# EAGLE board 226_arrayrelay (EAGLE 9.6.0)
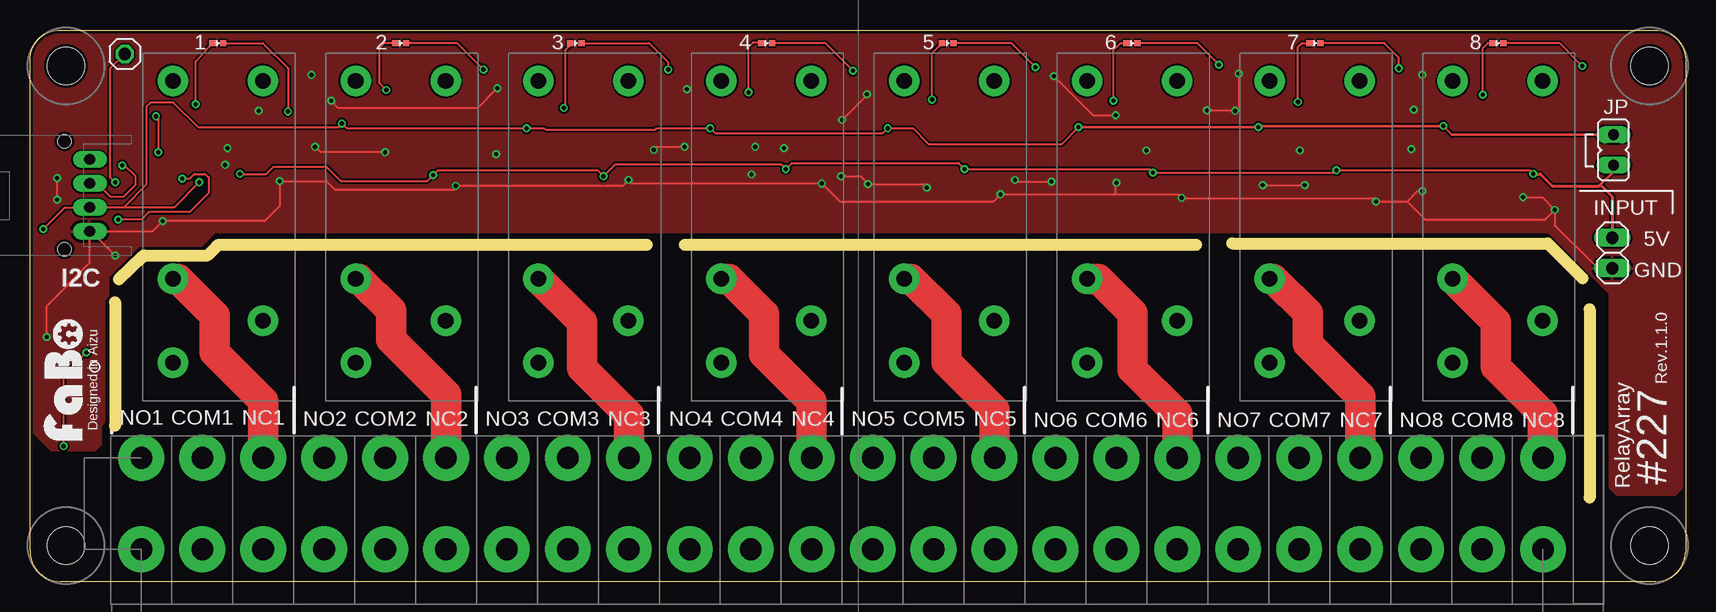
[diagram p0: board, top side]
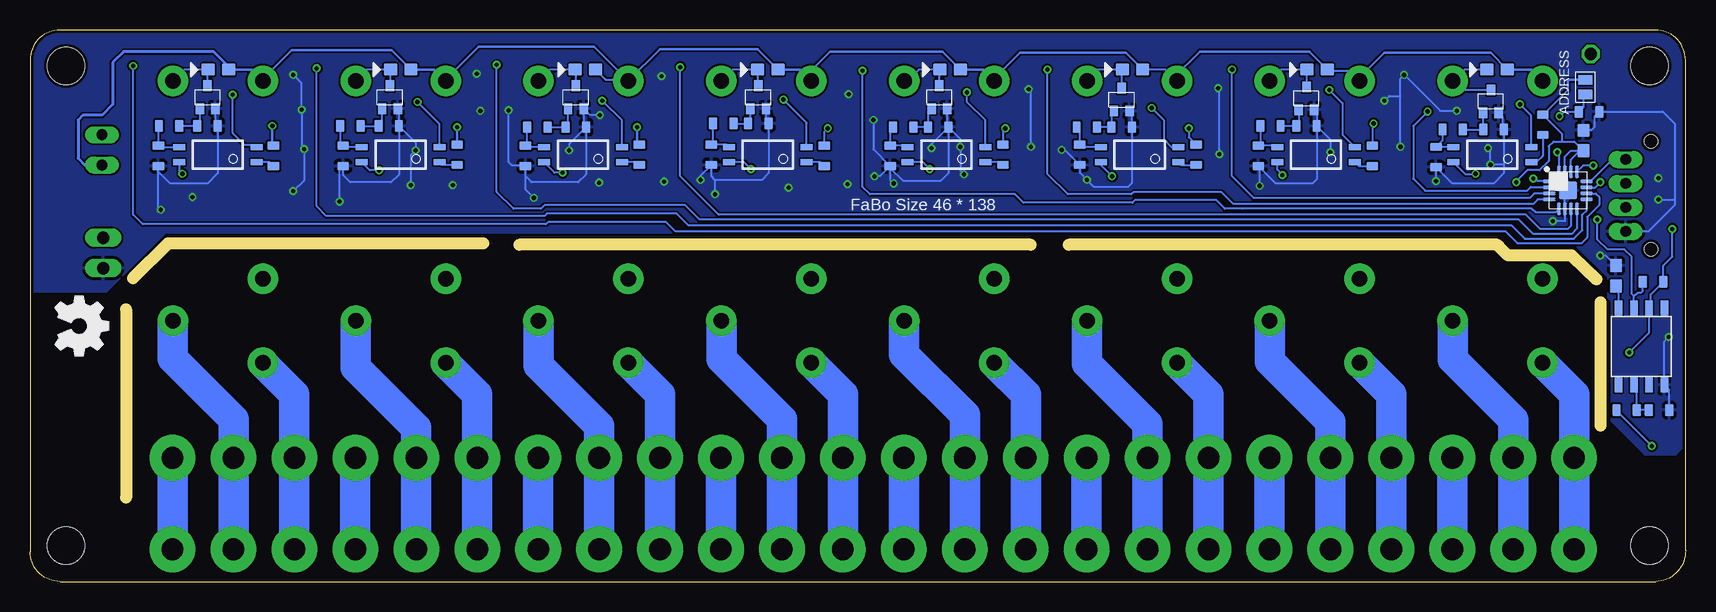
[diagram p1: board, bottom side, seen from below]

Size 138 x 46 mm. Coordinates in mm from the lower left corner, seen from the top.
Outline: 0,2.6 0,43.5 arc-90 2.5,46 135.5,46 arc-90 138,43.5 138,2.5 arc-90 135.5,0 2.5,0 arc-90 0,2.6
Copper layers (1*16): Top 0.035mm / dielectric 1.5mm / Bottom 0.035mm
Design rules "SeeedStudio_2layer_DRU_no_angle_20140221": minimum track width 6mil, minimum drill 12mil, track to track 6mil, track to pad 6mil, pad to pad 6mil, via to via 6mil, smd to smd 0mil, copper to edge 10mil, drill to drill 10mil, minimum pad ring 10mil, minimum via ring 6mil, stop-mask expansion 2mil, vias tented up to drill 100mil, thermal gap 10mil
Holes 3.1 mm at 3,3 3,43 135,43 135,3
Milling: 9 lines

## Footprints (pad centres in the part's own frame; a part is rotated, then mirrored left to right if it is on the bottom)
0603 = smd 1.1 x 1: 1 -0.85,0; 2 0.85,0
TBL004-508 = drill 1.8 pad 3.81: P$1 0,3.81; P$2 0,-3.81
0603' = smd 1.1 x 1: ANODE -0.85,0; CATHODE 0.85,0
NXP-PCAL6408A = smd 1 x 0.3: 1 -1.55,0.75; 2 -1.55,0.25; 3 -1.55,-0.25; 4 -1.55,-0.75; 9 1.55,-0.75; 10 1.55,-0.25; 11 1.55,0.25; 12 1.55,0.75 | smd 0.3 x 1: 5 -0.75,-1.55; 6 -0.25,-1.55; 7 0.25,-1.55; 8 0.75,-1.55; 13 0.75,1.55; 14 0.25,1.55; 15 -0.25,1.55; 16 -0.75,1.55 | smd 1.5 x 1.5: 17 0,0
FABO_BRICK_I2C_S04B-PASK-2_LONG = drill 0.9 pad 1.422 long: GND -3,0; SCL 3,0; SDA 1,0; VCC -1,0 | hole 1.1: 4.5,2.1; -4.5,2.1
1X01 = drill 1.016 octagon: 1 0,0
JP1 = drill 0.914 long: 1 0,-1.27; 2 0,1.27
1X02 = drill 1.016 long: 1 -1.27,0; 2 1.27,0
0402-NO_SILK = smd 0.5 x 0.5: ANODE -0.46,0; CATHODE 0.46,0
0603-NARROW = smd 0.71 x 1: 1 -0.85,0; 2 0.85,0
G2RL-1 = drill 1.3 pad 2.54: 1 -11.75,-3.75; 2 4.75,-3.75; 3 11.75,-3.75; 4 8.25,3.75; 5 -11.75,3.75
SMD-JUMPER-2-OPEN = smd 0.8 x 1.2: 1 -0.6,0; 2 0.6,0
SOT-323 = smd 0.7 x 0.9: 1 -0.65,-0.95; 2 0.65,-0.95; 3 0,0.95
11-3C1 = smd 1 x 0.5: 1 -3.24,0.635; 2 -3.24,-0.635; 3 3.24,-0.635; 4 3.24,0.635
SO8 = smd 1.27 x 0.635: 1 -3.21,1.87; 2 -3.21,0.6; 3 -3.21,-0.67; 4 -3.21,-1.94; 5 3.19,1.87; 6 3.19,0.6; 7 3.19,-0.67; 8 3.19,-1.94

## Placement (x,y rotation side)
C1  10uF  [0603]  8.51,36.78 270 bottom
C2  0.01uF  [0603]  5.8,25.5 270 bottom
COM1  TBL004-508  [TBL004-508]  14.36,6.5 0 top
COM2  TBL004-508  [TBL004-508]  29.6,6.5 0 top
COM3  TBL004-508  [TBL004-508]  44.84,6.5 0 top
COM4  TBL004-508  [TBL004-508]  60.08,6.5 0 top
COM5  TBL004-508  [TBL004-508]  75.32,6.5 0 top
COM6  TBL004-508  [TBL004-508]  90.56,6.5 0 top
COM7  TBL004-508  [TBL004-508]  105.8,6.5 0 top
COM8  TBL004-508  [TBL004-508]  121.04,6.5 0 top
D1  1N4188  [0603']  15.7,42.7 0 bottom
D2  1N4188  [0603']  30.7,42.7 0 bottom
D3  1N4188  [0603']  46.1,42.7 0 bottom
D4  1N4188  [0603']  61.3,42.7 0 bottom
D5  1N4188  [0603']  76.5,42.7 0 bottom
D6  1N4188  [0603']  91.7,42.7 0 bottom
D7  1N4188  [0603']  107.1,42.7 0 bottom
D8  1N4188  [0603']  122.3,42.7 0 bottom
IC1  [NXP-PCAL6408A]  9.8,32.62 0 bottom
J1  [FABO_BRICK_I2C_S04B-PASK-2_LONG]  4.99,32.2 90 top
JP1  [1X01]  7.9,44 0 top
JP2  [JP1]  132,36 180 top
JP3  [1X02]  131.9,27.4 270 top
LED1  [0402-NO_SILK]  15.66,44.9 0 top
LED2  [0402-NO_SILK]  30.9,44.9 0 top
LED3  [0402-NO_SILK]  45.5,44.9 0 top
LED4  [0402-NO_SILK]  61.38,44.9 0 top
LED5  [0402-NO_SILK]  76.5,44.9 0 top
LED6  [0402-NO_SILK]  91.86,44.9 0 top
LED7  [0402-NO_SILK]  107.1,44.9 0 top
LED8  [0402-NO_SILK]  122.34,44.9 0 top
NC1  TBL004-508  [TBL004-508]  19.44,6.5 0 top
NC2  TBL004-508  [TBL004-508]  34.68,6.5 0 top
NC3  TBL004-508  [TBL004-508]  49.92,6.5 0 top
NC4  TBL004-508  [TBL004-508]  65.16,6.5 0 top
NC5  TBL004-508  [TBL004-508]  80.4,6.5 0 top
NC6  TBL004-508  [TBL004-508]  95.64,6.5 0 top
NC7  TBL004-508  [TBL004-508]  110.88,6.5 0 top
NC8  TBL004-508  [TBL004-508]  126.12,6.5 0 top
R1  1.8K  [0603-NARROW]  19.4,37.7 0 bottom
R2  10K  [0603-NARROW]  16,37.7 180 bottom
R3  1K  [0603-NARROW]  20.8,35.4 90 bottom
R4  1K  [0603-NARROW]  11.9,38.1 270 bottom
R5  1.8K  [0603-NARROW]  34.6,38 0 bottom
R6  10K  [0603-NARROW]  31.6,38 180 bottom
R7  1K  [0603-NARROW]  35.6,35.5 90 bottom
R8  1K  [0603-NARROW]  26.1,35.5 270 bottom
R9  10k  [0603-NARROW]  8.05,39.18 180 bottom
R10  1.8K  [0603-NARROW]  49.9,37.9 0 bottom
R11  10K  [0603-NARROW]  47,37.9 180 bottom
R12  1K  [0603-NARROW]  50.5,35.6 90 bottom
R13  1K  [0603-NARROW]  40.8,35.6 270 bottom
R14  1.8K  [0603-NARROW]  65.2,37.9 0 bottom
R15  10K  [0603-NARROW]  62.3,37.9 180 bottom
R16  1K  [0603-NARROW]  66.3,35.5 90 bottom
R17  1K  [0603-NARROW]  56.9,35.6 270 bottom
R18  1.8K  [0603-NARROW]  80.2,38.2 0 bottom
R19  10K  [0603-NARROW]  77.3,38.2 180 bottom
R20  1K  [0603-NARROW]  81.2,35.6 90 bottom
R21  1K  [0603-NARROW]  71.8,35.5 270 bottom
R22  1.8K  [0603-NARROW]  95.7,37.9 0 bottom
R23  10K  [0603-NARROW]  92.5,37.9 180 bottom
R24  1K  [0603-NARROW]  96.7,35.5 90 bottom
R25  1K  [0603-NARROW]  87.2,35.6 270 bottom
R26  1.8K  [0603-NARROW]  111.3,38 0 bottom
R27  10K  [0603-NARROW]  108.1,38 180 bottom
R28  1K  [0603-NARROW]  111.9,35.5 90 bottom
R29  1K  [0603-NARROW]  102.4,35.6 270 bottom
R30  1.8K  [0603-NARROW]  126.4,38 0 bottom
R31  10K  [0603-NARROW]  123.2,38 180 bottom
R32  1K  [0603-NARROW]  127.3,35.5 90 bottom
R33  1K  [0603-NARROW]  117.7,35.5 270 bottom
R34  10k  [0603-NARROW]  2.7,25 0 bottom
R35  12k  [0603-NARROW]  4.9,14.3 180 bottom
R36  10k  [0603-NARROW]  2.2,14.3 180 bottom
RL1  G2RL-1  [G2RL-1]  15.66,30 270 top
RL2  G2RL-1  [G2RL-1]  30.9,30 270 top
RL3  G2RL-1  [G2RL-1]  46.14,30 270 top
RL4  G2RL-1  [G2RL-1]  61.38,30 270 top
RL5  G2RL-1  [G2RL-1]  76.62,30 270 top
RL6  G2RL-1  [G2RL-1]  91.86,30 270 top
RL7  G2RL-1  [G2RL-1]  107.1,30 270 top
RL8  G2RL-1  [G2RL-1]  122.34,30 270 top
SJ1  OPEN  [SMD-JUMPER-2-OPEN]  8.36,41.23 270 bottom
T1  MOSFETSOT-323  [SOT-323]  16.23,40.05 0 bottom
T2  MOSFETSOT-323  [SOT-323]  31.6,40.3 0 bottom
T3  MOSFETSOT-323  [SOT-323]  47,40.2 0 bottom
T4  MOSFETSOT-323  [SOT-323]  62.2,40.4 0 bottom
T5  MOSFETSOT-323  [SOT-323]  77.3,40.4 0 bottom
T6  MOSFETSOT-323  [SOT-323]  92.5,40.4 0 bottom
T7  MOSFETSOT-323  [SOT-323]  108,40.4 0 bottom
T8  MOSFETSOT-323  [SOT-323]  123.2,40.4 0 bottom
U1  TLP291A  [11-3C1]  30.8,35.6 180 bottom
U2  TLP291A  [11-3C1]  45.5,35.6 180 bottom
U3  TLP291A  [11-3C1]  61.6,35.6 180 bottom
U4  TLP291A  [11-3C1]  16.1,35.6 180 bottom
U5  TLP291A  [11-3C1]  76.5,35.6 180 bottom
U6  TLP291A  [11-3C1]  91.9,35.6 180 bottom
U7  TLP291A  [11-3C1]  107.1,35.6 180 bottom
U8  TLP291A  [11-3C1]  122.34,35.6 180 bottom
U$2  [LOGO_OSHW_M]  133.9,21.3 270 bottom
U$3  M51957B  [SO8]  3.7,19.6 90 bottom
U$4  [LOGO_FABO_MS]  4.77,16.83 90 top
U$7  TBL004-508  [TBL004-508]  9.28,6.5 0 top
U$9  TBL004-508  [TBL004-508]  24.52,6.5 0 top
U$12  TBL004-508  [TBL004-508]  39.76,6.5 0 top
U$15  TBL004-508  [TBL004-508]  55,6.5 0 top
U$18  TBL004-508  [TBL004-508]  70.24,6.5 0 top
U$21  TBL004-508  [TBL004-508]  85.48,6.5 0 top
U$24  TBL004-508  [TBL004-508]  100.72,6.5 0 top
U$27  TBL004-508  [TBL004-508]  115.96,6.5 0 top

## Library data of the parts
C1 C2 = FaBo-Capacitor
COM1-COM8 NC1-NC8 U$7 U$9 U$12 U$15 U$18 U$21 U$24 U$27 = FaBo-Terminal
D1-D8 = FaBo-Diode
IC1 = FaBo-Mems
J1 = FaBo-Template
JP1 JP3 = pinhead
JP2 = jumper
LED1-LED8 = FaBo-LED
R1-R36 = FaBo-Resistors
RL1-RL8 = FaBo-Relay
SJ1 = FaBo-Supply
T1-T8 = FaBo-Transistor
U1-U8 = FaBo_Photocoupler
U$2 = FaBo-Logo
U$3 U$4 = FaBo-etc

## Nets
+5V: D1.CATHODE D2.CATHODE D3.CATHODE D4.CATHODE D5.CATHODE D6.CATHODE D7.CATHODE D8.CATHODE JP2.2 JP3.1 RL1.1 RL2.1 RL3.1 RL4.1 RL5.1 RL6.1 RL7.1 RL8.1 U1.4 U2.4 U3.4 U4.4 U5.4 U6.4 U7.4 U8.4
ADDRESS: IC1.16 R9.2 SJ1.2
GND: C1.1 C2.1 IC1.6 IC1.17 J1.GND JP3.2 R2.1 R3.1 R6.1 R7.1 R9.1 R11.1 R12.1 R15.1 R16.1 R19.1 R20.1 R23.1 R24.1 R27.1 R28.1 R31.1 R32.1 R36.1 T1.2 T2.2 T3.2 T4.2 T5.2 T6.2 T7.2 T8.2 U$3.4
GPIO0: IC1.2 LED1.CATHODE
GPIO1: IC1.3 LED2.CATHODE
GPIO2: IC1.4 LED3.CATHODE
GPIO3: IC1.5 LED4.CATHODE
GPIO4: IC1.7 LED5.CATHODE
GPIO5: IC1.8 LED6.CATHODE
GPIO6: IC1.9 LED7.CATHODE
GPIO7: IC1.10 LED8.CATHODE
INT: IC1.11 JP1.1
N$2: D1.ANODE RL1.5 T1.3
N$3: R1.1 R3.2 U4.3
N$4: R1.2 R2.2 T1.1
N$5: LED1.ANODE U4.2
N$6: D2.ANODE RL2.5 T2.3
N$7: R4.2 U4.1
N$8: NC1.P$1 NC1.P$2 RL1.2
N$9: COM1.P$1 COM1.P$2 RL1.4
N$10: RL1.3 U$7.P$1 U$7.P$2
N$11: R5.1 R7.2 U1.3
N$12: R5.2 R6.2 T2.1
N$13: NC2.P$1 NC2.P$2 RL2.2
N$14: COM2.P$1 COM2.P$2 RL2.4
N$15: RL2.3 U$9.P$1 U$9.P$2
N$16: LED2.ANODE U1.2
N$17: R8.2 U1.1
N$18: D3.ANODE RL3.5 T3.3
N$19: R10.1 R12.2 U2.3
N$20: R10.2 R11.2 T3.1
N$21: NC3.P$1 NC3.P$2 RL3.2
N$22: COM3.P$1 COM3.P$2 RL3.4
N$23: RL3.3 U$12.P$1 U$12.P$2
N$24: LED3.ANODE U2.2
N$25: R13.2 U2.1
N$26: D4.ANODE RL4.5 T4.3
N$27: R14.1 R16.2 U3.3
N$28: R14.2 R15.2 T4.1
N$29: NC4.P$1 NC4.P$2 RL4.2
N$30: COM4.P$1 COM4.P$2 RL4.4
N$31: RL4.3 U$15.P$1 U$15.P$2
N$32: LED4.ANODE U3.2
N$33: R17.2 U3.1
N$34: D5.ANODE RL5.5 T5.3
N$35: R18.1 R20.2 U5.3
N$36: R18.2 R19.2 T5.1
N$37: NC5.P$1 NC5.P$2 RL5.2
N$38: COM5.P$1 COM5.P$2 RL5.4
N$39: RL5.3 U$18.P$1 U$18.P$2
N$40: LED5.ANODE U5.2
N$41: R21.2 U5.1
N$42: D6.ANODE RL6.5 T6.3
N$43: R22.1 R24.2 U6.3
N$44: R22.2 R23.2 T6.1
N$45: NC6.P$1 NC6.P$2 RL6.2
N$46: COM6.P$1 COM6.P$2 RL6.4
N$47: RL6.3 U$21.P$1 U$21.P$2
N$48: LED6.ANODE U6.2
N$49: R25.2 U6.1
N$50: D7.ANODE RL7.5 T7.3
N$51: R26.1 R28.2 U7.3
N$52: R26.2 R27.2 T7.1
N$53: NC7.P$1 NC7.P$2 RL7.2
N$54: COM7.P$1 COM7.P$2 RL7.4
N$55: RL7.3 U$24.P$1 U$24.P$2
N$56: LED7.ANODE U7.2
N$57: R29.2 U7.1
N$58: D8.ANODE RL8.5 T8.3
N$59: R30.1 R32.2 U8.3
N$60: R30.2 R31.2 T8.1
N$61: NC8.P$1 NC8.P$2 RL8.2
N$62: COM8.P$1 COM8.P$2 RL8.4
N$63: RL8.3 U$27.P$1 U$27.P$2
N$64: LED8.ANODE U8.2
N$65: R33.2 U8.1
N$66: IC1.1 R34.1 U$3.6
N$67: R35.1 R36.2 U$3.2
N$68: C2.2 U$3.5
SCL: IC1.12 J1.SCL
SDA: IC1.13 J1.SDA
VCC: C1.2 IC1.14 IC1.15 J1.VCC JP2.1 R4.1 R8.1 R13.1 R17.1 R21.1 R25.1 R29.1 R33.1 R34.2 R35.2 SJ1.1 U$3.7

## Tracks (layer width: path | path; a pad name or v marks a point on that pad's centre or on a via)
+5V  (via drill 0.35)
  Top 0.152: v17.5,34 19.7,34 20.3,34.6 24.7,34.6 25.9,33.4 33.1,33.4 v33.6,33.9 34,34.3 47.3,34.3 v47.8,33.8 48.8,34.8 62.6,34.8 v63,34.4 63.5,34.9 77.4,34.9 v77.9,34.4 93.3,34.4 v93.6,34.1 108.7,34.1 v108.9,34.3 125,34.3 v125.3,34
  Top 0.254: v125.3,34 125.9,34 126.9,33 130.8,33 130.9,33.1 | 130.9,33.1 132,34.2 JP2.2 | 130.9,33.1 131.9,32.1 JP3.1
  Bottom 0.152: U8.4 125.58,34.28 v125.3,34 | U4.4 18.38,34 v17.5,34 | v33.6,33.9 34.04,34.34 U1.4 | v47.8,33.8 48.74,34.74 U2.4 | v63,34.4 63.56,34.97 U3.4 | v77.9,34.4 78.47,34.97 U5.4 | v93.6,34.1 94.28,34.1 U6.4 | v108.9,34.3 109.67,34.3 U7.4 | D2.CATHODE 29.75,42.6 28,42.6 27.3,41.9 RL2.1 | RL3.1 42.67,42.03 43.34,42.7 D3.CATHODE | D7.CATHODE 106.15,42.6 | 103.35,41.85 RL7.1 | D6.CATHODE 90.02,41.87 88.23,41.87
  Bottom 0.203: RL1.1 12.86,42.7 D1.CATHODE 16.25,44.1 25.1,44.1 27.3,41.9 | RL8.1 118.67,41.83 | 118.67,41.83 119.54,42.7 D8.CATHODE | RL7.1 104.3,42.7 D7.CATHODE 107.85,44.3 116.2,44.3 118.67,41.83 | 90.75,42.8 D6.CATHODE | RL4.1 57.74,41.86 | 57.74,41.86 58.58,42.7 D4.CATHODE 61.95,44.2 71.3,44.2 72.87,42.63 RL5.1 73.82,42.7 D5.CATHODE 77.35,44.4 85.5,44.4 88.13,41.77 | D2.CATHODE 31.35,44.2 40.5,44.2 42.67,42.03 | D3.CATHODE 46.65,44.1 55.5,44.1 57.74,41.86 | RL6.1 88.13,41.77 | 88.13,41.77 88.23,41.87 90.96,44.6 100.6,44.6 103.35,41.85
  Bottom 0.254: D8.CATHODE 121.45,42.95 122.7,44.2 130.2,44.2 131.1,43.3 131.1,39.8 132,38.9 133.6,38.9 134,38.5 134,35.3 133.43,34.73 JP2.2
ADDRESS  (via drill 0.35)
  Top 0.152: v10.7,35.8 10.7,38.6 v10.5,38.8
  Bottom 0.152: 8.6,40.6 8.5,40.7 8.5,40.5 | 8.5,40.5 SJ1.2 | v10.7,35.8 10.55,35.65 IC1.16 | 8.5,40.5 8.5,39.58 R9.2 10.12,39.18 v10.5,38.8
GND  (via drill 0.35)
  Top 0.152: v11.06,30.06 11.05,30.05 | 11.05,30.05 10.2,29.2 5.1,29.2 | 11.05,30.05 19.55,30.05 20.8,31.3 v20.8,33.4 24.7,33.4 25.4,32.7 35.4,32.7 35.7,33 | 35.7,33 49.4,33 v49.9,33.5 50.2,33.2 v66,33.2 67.5,31.7 80.3,31.7 v80.9,32.3 90.5,32.3 | 35.7,33 v35.5,33 | 90.5,32.3 95.7,32.3 v96,32 111.9,32 v112.2,31.7 114.8,31.7 | 114.8,31.7 116.3,30.2 126.3,30.2 v127.1,31 | v127.1,31 127.1,29.7 130.67,26.13 JP3.2 | v7.1,27.2 5.1,29.2 | 5.1,29.2 J1.GND 4.99,26.59 1.4,23 v1.4,20.4 | v2.26,31.86 v2.26,33.66 | v29.6,35.8 24.21,35.8 v23.76,36.26 | v38.96,41.16 37.3,39.5 25.7,39.5 v25.1,40.1 | v52,36 52.26,36.26 v54.56,36.26 | v67.6,33.8 69.21,33.8 v69.86,33.16 74.46,33.16 v74.76,32.86 | v69.76,40.66 69.76,40.56 v67.7,38.5 | v82.1,33.5 82.24,33.36 v85.16,33.36 | v85.36,42.16 88.61,38.9 v90.5,38.9 | 90.5,32.3 90.5,33.2 v90.56,33.26 | v100.76,42.36 100.76,39.56 100.5,39.3 | 100.5,39.3 v100.46,39.26 | v98.1,39.3 100.5,39.3 | v102.76,33.06 v106.26,33.06 | 114.8,31.7 115.66,32.56 v116.06,32.56 | v124.46,32.06 126.04,32.06 v127.1,31
  Bottom 0.152: R2.1 15.15,37.3 | 15.15,37.3 15.15,34.8 | 15.15,34.8 15.15,34.05 16,33.2 19.45,33.2 R3.1 v20.8,33.4 | T1.2 15.28,38.8 15.28,37.42 15.15,37.3 | C1.1 7.87,37.63 7.6,37.9 7.6,38.78 R9.1 7.18,39.2 1.9,39.2 0.9,38.2 0.9,31.8 | IC1.6 10.05,32.38 IC1.17 | IC1.6 10.14,31.07 | IC1.6 10.05,30.06 v11.06,30.06 | T2.2 30.75,39.15 R6.1 | T3.2 46.15,39.05 R11.1 46.15,33.25 46.5,32.9 49.3,32.9 v49.9,33.5 50.5,34.1 R12.1 51.75,36 v52,36 | v35.5,33 35.5,34.55 R7.1 34.15,33.2 31.1,33.2 30.75,33.55 R6.1 | T4.2 61.55,38 R15.1 | R16.1 66.3,34.5 | 66.3,34.5 66.3,33.5 v66,33.2 | T5.2 76.65,38.4 R19.1 76.45,34.05 77,33.5 80.9,33.5 | R23.1 91.85,38.1 T6.2 91.3,38.9 v90.5,38.9 | R27.1 107.25,39.35 T7.2 | T8.2 122.55,38.2 R31.1 122.35,34.05 123.2,33.2 126.3,33.2 127.3,34.2 | 127.3,34.2 R32.1 | R27.1 107.25,33.95 107.9,33.3 111.3,33.3 111.9,33.9 R28.1 112.2,34.35 v112.2,31.7 | R23.1 91.65,33.95 92.3,33.3 96.2,33.3 96.7,33.8 | 96.7,33.8 R24.1 96.75,34.7 97.8,34.7 98.1,35 v98.1,39.3 | 80.9,33.5 81.2,33.8 R20.1 82.1,33.85 v82.1,33.5 | R15.1 61.45,34.05 62.1,33.4 65.2,33.4 66.3,34.5 | v80.9,32.3 80.9,33.5 | v96,32 96.7,32.7 96.7,33.8 | v127.1,31 127.3,31.2 127.3,34.2 | 0.9,31.8 0.9,31.4 3.1,29.2 J1.GND | R36.1 1.35,15.98 U$3.4 1.76,20.04 v1.4,20.4 | C2.1 6.65,27.2 v7.1,27.2 | v2.26,31.86 0.96,31.86 0.9,31.8 | v23.76,36.26 23.76,40.5 | 23.76,40.5 23.76,41.96 v23.46,42.26 20.46,39.26 v19.06,39.26 | R6.1 29.6,36.85 v29.6,35.8 | v38.86,35.66 38.86,41.06 v38.96,41.16 | v25.1,40.1 24.7,40.5 23.76,40.5 | v54.56,36.26 54.56,40.86 v54.76,41.06 | R16.1 67.15,33.8 v67.6,33.8 | v67.7,38.5 67.7,36.05 R16.1 | R23.1 93.06,36.49 v93.06,35.96
  Bottom 0.152: v106.26,33.06 106.26,35.56 v105.86,35.96 105.86,36.61 R27.1 | v116.06,32.56 115.16,33.46 v115.16,36.06 115.36,36.26 v115.36,39.36 115.36,41.56 v116.06,42.26 | R15.1 62.86,36.49 v62.86,36.16 | R15.1 60.46,36.91 v60.46,36.26 60.46,34.26 v60.16,33.96 | v16.46,36.16 16.26,35.96 v16.26,34.76 16.21,34.8 15.15,34.8
  pour Bottom: -0.5,47.5 -0.1,47.9 138.4,47.9 140,46.3 140,26.4 137.8,24.2 131.6,24.2 126.7,29.1 15.4,29.1 14.3,28 9.1,28 6.5,25.4 6.5,23.7 6.2,23.4 6.2,13.4 3.4,10.6 0.8,10.6 -0.5,11.9
  pour Top: -0.4,48.2 -0.3,48.3 138.6,48.3 140.6,46.3 140.6,26.5 137.9,23.8 137.9,8 137.1,7.2 132.3,7.2 131.7,7.8 131.7,24 126.6,29.1 15.4,29.1 14.3,28 9.1,28 6.5,25.4 6.5,23.8 6.2,23.5 6.2,13.3 5.9,13 5.9,11.4 5.4,10.9 1.8,10.9 -0.4,13.1
GPIO0  (via drill 0.35)
  Top 0.152: LED1.CATHODE 19.4,44.9 21.5,42.8 v21.5,39.2
  Bottom 0.152: v21.5,39.2 22.7,38 22.7,33.6 21.7,32.6 13.2,32.6 12.9,32.9 11.38,32.9 IC1.2
GPIO1  (via drill 0.35)
  Top 0.152: v37.8,42.7 35.6,44.9 LED2.CATHODE
  Bottom 0.152: IC1.3 12.62,32.38 13,32 36,32 37.8,33.8 v37.8,42.7
GPIO2  (via drill 0.35)
  Top 0.152: LED3.CATHODE 51.6,44.9 53.2,43.3 v53.2,42.7
  Bottom 0.152: IC1.4 12.32,31.88 12.7,31.5 37.7,31.5 38.7,32.5 46,32.5 46.2,32.3 51.5,32.3 53.2,34 v53.2,42.7
GPIO3  (via drill 0.35)
  Top 0.152: v68.6,42.6 66.3,44.9 LED4.CATHODE
  Bottom 0.152: v68.6,42.6 68.6,32.9 68,32.3 55.9,32.3 55.2,31.6 46.1,31.6 45.9,31.8 39.1,31.8 38.4,31.1 36.93,31.1 36.93,31.09 12.79,31.09 12.5,30.8 10.82,30.8 IC1.5
GPIO4  (via drill 0.35)
  Top 0.152: v83.8,42.9 81.8,44.9 LED5.CATHODE
  Bottom 0.152: IC1.7 9.55,29.65 9.8,29.4 12.1,29.4 13.3,30.6 80.6,30.6 83.8,33.8 v83.8,42.9
GPIO5  (via drill 0.35)
  Top 0.152: v99.1,43.1 97.3,44.9 LED6.CATHODE
  Bottom 0.152: IC1.8 9.05,29.45 9.5,29 12.7,29 13.9,30.2 82.2,30.2 83.4,31.4 95.1,31.4 95.4,31.1 97.7,31.1 99.1,32.5 v99.1,43.1
GPIO6  (via drill 0.35)
  Top 0.152: v114.1,42.8 114.1,43.7 112.9,44.9 LED7.CATHODE
  Bottom 0.152: 8.22,31.9 IC1.9 8.25,30.95 8.6,30.6 8.6,29.3 9.3,28.6 13.4,28.6 14.5,29.7 83.1,29.7 84.1,30.7 94.9,30.7 95.1,30.5 113.3,30.5 114.1,31.3 v114.1,42.8
GPIO7  (via drill 0.35)
  Top 0.152: v129.4,43 127.5,44.9 LED8.CATHODE
  Bottom 0.152: 8.22,32.4 IC1.10 7.47,32.38 7.2,32.1 7.2,31.4 8.2,30.4 8.2,28.7 8.7,28.2 14,28.2 15,29.2 84.2,29.2 85,30 94.8,30 95,29.8 128.6,29.8 129.4,30.6 v129.4,43
INT  (via drill 0.35)
  Top 0.152: v7.1,33.3 6.7,33.7 6.7,42.8 JP1.1
  Bottom 0.152: IC1.11 7.53,32.88 v7.1,33.3
N$2
  Bottom 0.152: 16.23,41.1 T1.3 18.66,41 19.38,41.72 | 19.38,41.72 RL1.5 | D1.ANODE 18.4,42.7 19.38,41.72
N$3
  Bottom 0.152: U4.3 19.36,36.25 R3.2 20.25,36.8 R1.1
N$4
  Bottom 0.152: R1.2 R2.2 16.85,39.08 T1.1
N$5  (via drill 0.35)
  Top 0.152: v13.8,39.8 13.8,43.36 LED1.ANODE
  Bottom 0.152: U4.2 12.86,38.86 v13.8,39.8
N$6
  Bottom 0.152: T2.3 31.55,41.3 D2.ANODE 33.7,42.7 RL2.5
N$7
  Bottom 0.152: U4.1 12.44,34.97 11.9,35.5 R4.2
  Bottom 0.305: U4.1 12.54,34.97
N$8
  Top 2.54: NC1.P$1 19.44,15.06 15.4,19.1 15.4,22.2 12.35,25.25 RL1.2
  Bottom 2.54: NC1.P$1 NC1.P$2
N$9
  Bottom 2.54: COM1.P$2 COM1.P$1 14.36,13.46 19.41,18.51 RL1.4
N$10
  Bottom 2.54: U$7.P$2 U$7.P$1 9.28,15.62 RL1.3
N$11
  Bottom 0.152: R5.1 35.45,36.5 R7.2 34.16,36.35 U1.3
N$12
  Bottom 0.152: T2.1 32.25,38.2 R6.2 R5.2
N$13
  Top 2.54: NC2.P$1 34.68,15.62 30.1,20.2 30.1,22.6 27.45,25.25 RL2.2
  Bottom 2.54: NC2.P$1 NC2.P$2
N$14
  Bottom 2.54: COM2.P$2 COM2.P$1 29.6,13.3 34.65,18.35 RL2.4
N$15
  Bottom 2.54: U$9.P$2 U$9.P$1 24.52,15.62 RL2.3
N$16  (via drill 0.35)
  Top 0.152: LED2.ANODE 29.5,44.9 29.1,44.5 29.1,41.6 v29.7,41
  Bottom 0.152: v29.7,41 28.6,39.9 28.6,37.27 U1.2
N$17
  Bottom 0.152: U1.1 27.25,34.65 R8.2
N$18
  Bottom 0.152: D3.ANODE 47.2,42.7 | 47.2,42.7 48.94,42.7 RL3.5 | T3.3 47,42.5 47.2,42.7
N$19
  Bottom 0.152: U2.3 50.28,36.23 R12.2 50.5,37.65 R10.1
N$20
  Bottom 0.152: T3.1 47.85,39.05 R11.2 R10.2
N$21
  Top 2.54: NC3.P$1 49.92,13.88 46,17.8 46,21.64 RL3.2
  Bottom 2.54: NC3.P$1 NC3.P$2
N$22
  Bottom 2.54: COM3.P$2 COM3.P$1 44.84,13.14 49.89,18.19 RL3.4
N$23
  Bottom 2.54: U$12.P$2 U$12.P$1 39.76,15.62 RL3.3
N$24  (via drill 0.35)
  Top 0.152: LED3.ANODE 45.2,44.9 44.6,44.3 44.6,39.6 v44.5,39.5
  Bottom 0.152: v44.5,39.5 43.5,38.5 43.5,36.9 42.84,36.23 U2.2
N$25
  Bottom 0.152: U2.1 42.05,34.75 R13.2
N$26
  Bottom 0.152: T4.3 62.2,42.65 D4.ANODE 63.9,42.7 64.85,41.75 RL4.5
N$27
  Bottom 0.152: R14.1 66.3,37.65 R16.2 64.95,36.35 U3.3
N$28
  Bottom 0.152: T4.1 63.15,39.15 R15.2 R14.2
N$29
  Top 2.54: NC4.P$1 65.16,15.04 61.2,19 61.2,22.3 58.25,25.25 RL4.2
  Bottom 2.54: NC4.P$1 NC4.P$2
N$30
  Bottom 2.54: COM4.P$2 COM4.P$1 60.08,13.88 65.13,18.93 RL4.4
N$31
  Bottom 2.54: U$15.P$2 U$15.P$1 55,15.62 RL4.3
N$32  (via drill 0.35)
  Top 0.152: v59.9,40.8 59.9,44.6 60.3,45 60.94,45 LED4.ANODE
  Bottom 0.152: U3.2 58.36,38.46 59.9,40 v59.9,40.8
N$33
  Bottom 0.152: R17.2 57.12,34.97 U3.1
N$34
  Bottom 0.152: D5.ANODE 77.4,42.7 | 77.4,42.7 79.42,42.7 RL5.5 | T5.3 77.3,42.6 77.4,42.7
N$35
  Bottom 0.152: U5.3 79.95,36.45 R20.2 81.05,36.6 R18.1
N$36
  Bottom 0.152: R18.2 R19.2 77.95,38.4 T5.1
N$37
  Top 2.54: NC5.P$1 80.4,14.3 76.4,18.3 76.4,22.3 73.45,25.25 RL5.2
  Bottom 2.54: NC5.P$1 NC5.P$2
N$38
  Bottom 2.54: COM5.P$2 COM5.P$1 75.32,13.52 80.37,18.57 RL5.4
N$39
  Bottom 2.54: RL5.3 70.24,15.62 U$18.P$1 U$18.P$2
N$40  (via drill 0.35)
  Top 0.152: v75.2,40.2 75.2,44.06 LED5.ANODE
  Bottom 0.152: U5.2 73.26,38.26 v75.2,40.2
N$41
  Bottom 0.152: R21.2 72.11,34.97 U5.1
N$42
  Bottom 0.152: T6.3 92.5,42.65 D6.ANODE 94.66,42.7 RL6.5
N$43
  Bottom 0.152: U6.3 96.58,36.23 R24.2 96.55,36.5 R22.1
N$44
  Bottom 0.152: R22.2 R23.2 93.15,38.1 T6.1
N$45
  Top 2.54: NC6.P$1 95.64,13.96 91.9,17.7 91.9,22.4 89.05,25.25 RL6.2
  Bottom 2.54: NC6.P$1 NC6.P$2
N$46
  Bottom 2.54: COM6.P$2 COM6.P$1 90.56,12.96 95.61,18.01 RL6.4
N$47
  Bottom 2.54: U$21.P$2 U$21.P$1 85.48,15.62 RL6.3
N$48  (via drill 0.35)
  Top 0.152: v90.3,40.1 90.3,44.3 90.9,44.9 LED6.ANODE
  Bottom 0.152: U6.2 88.66,38.46 v90.3,40.1
N$49
  Bottom 0.152: R25.2 87.42,34.97 U6.1
N$50
  Bottom 0.152: T7.3 107.95,41.4 D7.ANODE 109.9,42.7 RL7.5
N$51
  Bottom 0.152: U7.3 111.78,36.23 R28.2 112.15,36.6 R26.1
N$52
  Bottom 0.152: R26.2 R27.2 108.65,38.3 T7.1
N$53
  Top 2.54: NC7.P$1 110.88,15.42 106.5,19.8 106.5,22.4 103.65,25.25 RL7.2
  Bottom 2.54: NC7.P$1 NC7.P$2
N$54
  Bottom 2.54: COM7.P$2 COM7.P$1 105.8,12.8 110.85,17.85 RL7.4
N$55
  Bottom 2.54: U$24.P$2 U$24.P$1 100.72,15.62 RL7.3
N$56  (via drill 0.35)
  Top 0.152: v105.7,40 105.7,44.6 106,44.9 LED7.ANODE
  Bottom 0.152: U7.2 103.86,38.16 v105.7,40
N$57
  Bottom 0.152: R29.2 103.64,34.75 U7.1
N$58
  Bottom 0.152: D8.ANODE 123.2,42.7 | 123.2,42.7 125.14,42.7 RL8.5 | T8.3 123.2,42.7
N$59
  Bottom 0.152: R30.1 127.3,37.95 R32.2 127.19,36.23 U8.3
N$60
  Bottom 0.152: T8.1 123.85,38.2 R31.2 R30.2
N$61
  Top 2.54: NC8.P$1 126.12,13.98 122.2,17.9 122.2,21.64 RL8.2
  Bottom 2.54: NC8.P$1 NC8.P$2
N$62
  Bottom 2.54: COM8.P$2 COM8.P$1 121.04,13.54 126.09,18.59 RL8.4
N$63
  Bottom 2.54: U$27.P$2 U$27.P$1 115.96,15.62 RL8.3
N$64  (via drill 0.35)
  Top 0.152: v121.1,40.6 121.1,44.5 121.5,44.9 LED8.ANODE
  Bottom 0.152: U8.2 119.27,36.4 120.1,36.4 121.1,37.4 v121.1,40.6
N$65
  Bottom 0.152: R33.2 118.02,34.97 U8.1
N$66  (via drill 0.35)
  Top 0.152: v12.7,33.6 13.3,33.6 13.7,34 14.6,34 14.9,33.7 14.9,32.4 13.3,30.8 9.9,30.8 9.3,30.2 v7.34,30.2
  Bottom 0.152: IC1.1 11.38,33.4 12.5,33.4 v12.7,33.6 | v7.34,30.2 v7.34,30.19 7.34,28.54 6.5,27.7 5.1,27.7 4.5,27.1 4.5,24 4.3,23.8 | U$3.6 4.3,23.8 | 4.3,23.8 4,24.1 3.7,24.1 3.55,24.25 R34.1
N$67
  Bottom 0.152: U$3.2 4.05,16.14 R35.1 R36.2
N$68
  Bottom 0.152: U$3.5 5.57,24.42 C2.2
SCL
  Bottom 0.152: IC1.12 7.92,33.38 6.1,35.2 J1.SCL
SDA  (via drill 0.35)
  Top 0.152: J1.SDA 5.6,33.2 6.7,32.1 7.8,32.1 8.8,33.1 8.8,33.8 7.9,34.7 v7.7,34.7
  Bottom 0.152: v7.7,34.7 8.53,34.7 IC1.13
VCC  (via drill 0.35)
  Top 0.152: 7.8,31.2 9.7,33.1 9.7,39.6 10.05,39.95 11.95,39.95 14,37.9 25.7,37.9 v26,38.2 26.41,37.8 40.43,37.8 v41.4,37.8 42.87,37.8 42.97,37.7 52.13,37.7 52.23,37.8 v56.7,37.8 57.1,37.4 71.1,37.4 v71.5,37.8 73.6,37.8 74.9,36.5 86,36.5 v87.4,37.9 | 7.8,31.2 J1.VCC 2.9,31.2 v1.1,29.4 | v14.1,33.3 12,31.2 7.8,31.2 | v2.8,11.3 2.8,17.2 v4.7,19.1
  Top 0.203: JP2.1 118.53,37.27 v117.8,38 102.5,38 v102.4,37.9 v87.4,37.9
  Bottom 0.152: 11.9,38.8 R4.1 10.3,37.35 10.3,36.7 | v14.1,33.3 14.03,33.38 14.03,33.48 13.2,34.3 12.18,34.3 11.4,35.08 11.4,36.3 11,36.7 10.3,36.7 | 8.8,35.93 C1.2 9.28,36.7 10.3,36.7 | IC1.14 9.55,35.18 8.8,35.93 | v26,38.2 26.1,38.1 R8.1 | v41.4,37.8 41.4,37.05 R13.1 | v56.7,37.8 56.9,37.6 R17.1 | v71.5,37.8 71.8,37.5 R21.1 | IC1.15 10.05,35.45 9.57,35.93 8.8,35.93 | v1.1,29.4 1.1,27.1 1.85,26.35 R34.2 2.9,23.95 2.9,22.92 U$3.7 3.03,20.77 v4.7,19.1 | R35.2 5.75,14.25 v2.8,11.3
  Bottom 0.203: v117.8,38 117.8,36.45 R33.1 | R29.1 v102.4,37.9 | v87.4,37.9 87.4,36.65 R25.1 | R4.1 11.85,38.95 9.8,41 9.8,41.8 9.77,41.84 SJ1.1

## Text on the board
tPlace: 1 | 2 | 3 | 4 | 5 | 6 | 7 | 8 | JP | INPUT | 5V | GND | I2C | Designed in Aizu | Rev.1.1.0 | NO1 | COM1 | NC1 | NO2 | COM2 | NC2 | NO3 | COM3 | NC3 | NO4 | COM4 | NC4 | NO5 | COM5 | NC5 | NO6 | COM6 | NC6 | NO7 | COM7 | NC7 | NO8 | COM8 | NC8 | #227 | RelayArray
bPlace: ADDRESS | FaBo Size 46 * 138